# EAGLE board LED_RIng_PCB_v13 (EAGLE 9.7.0)
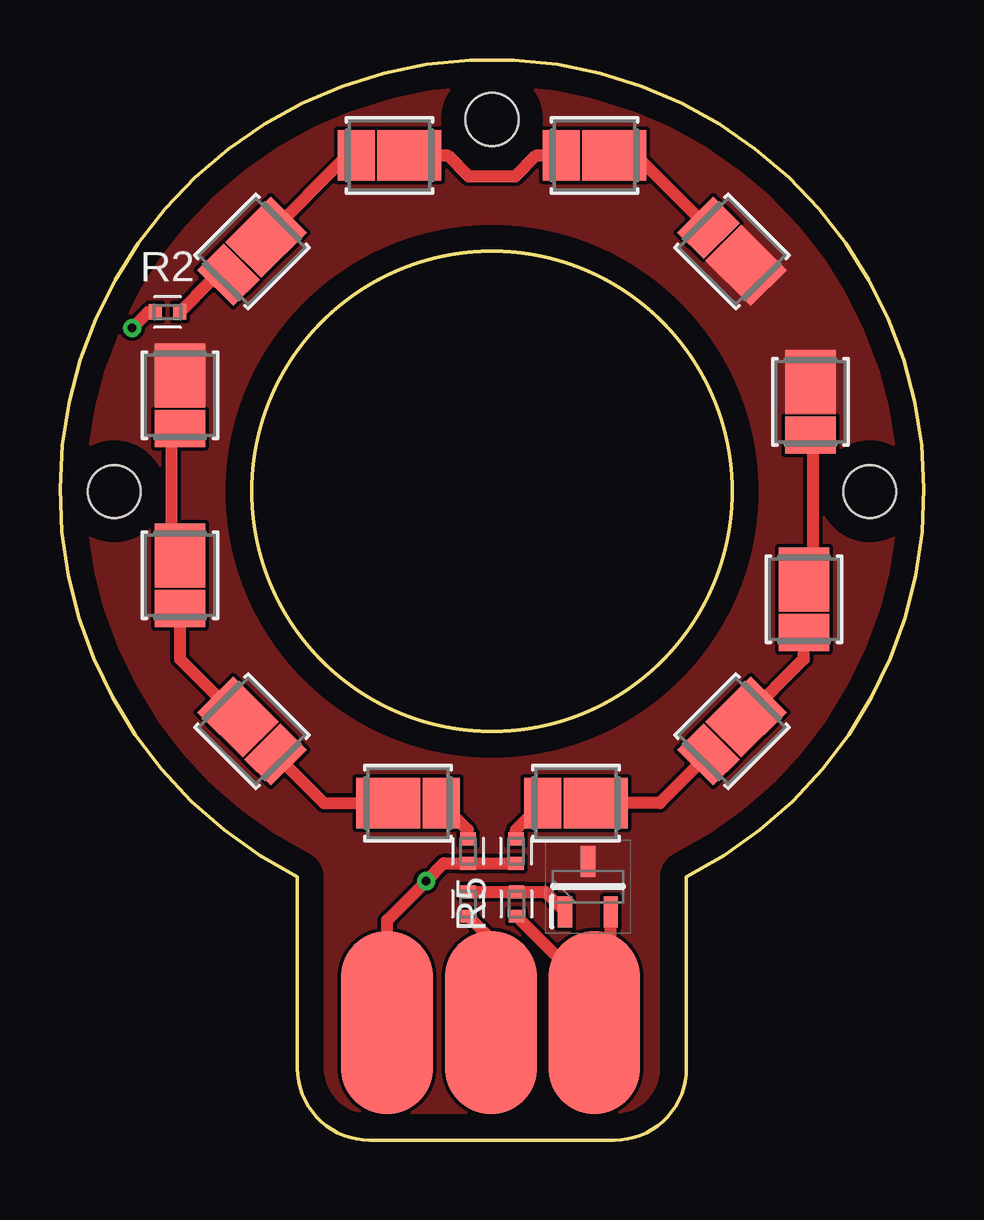
[diagram p0: board, top side]
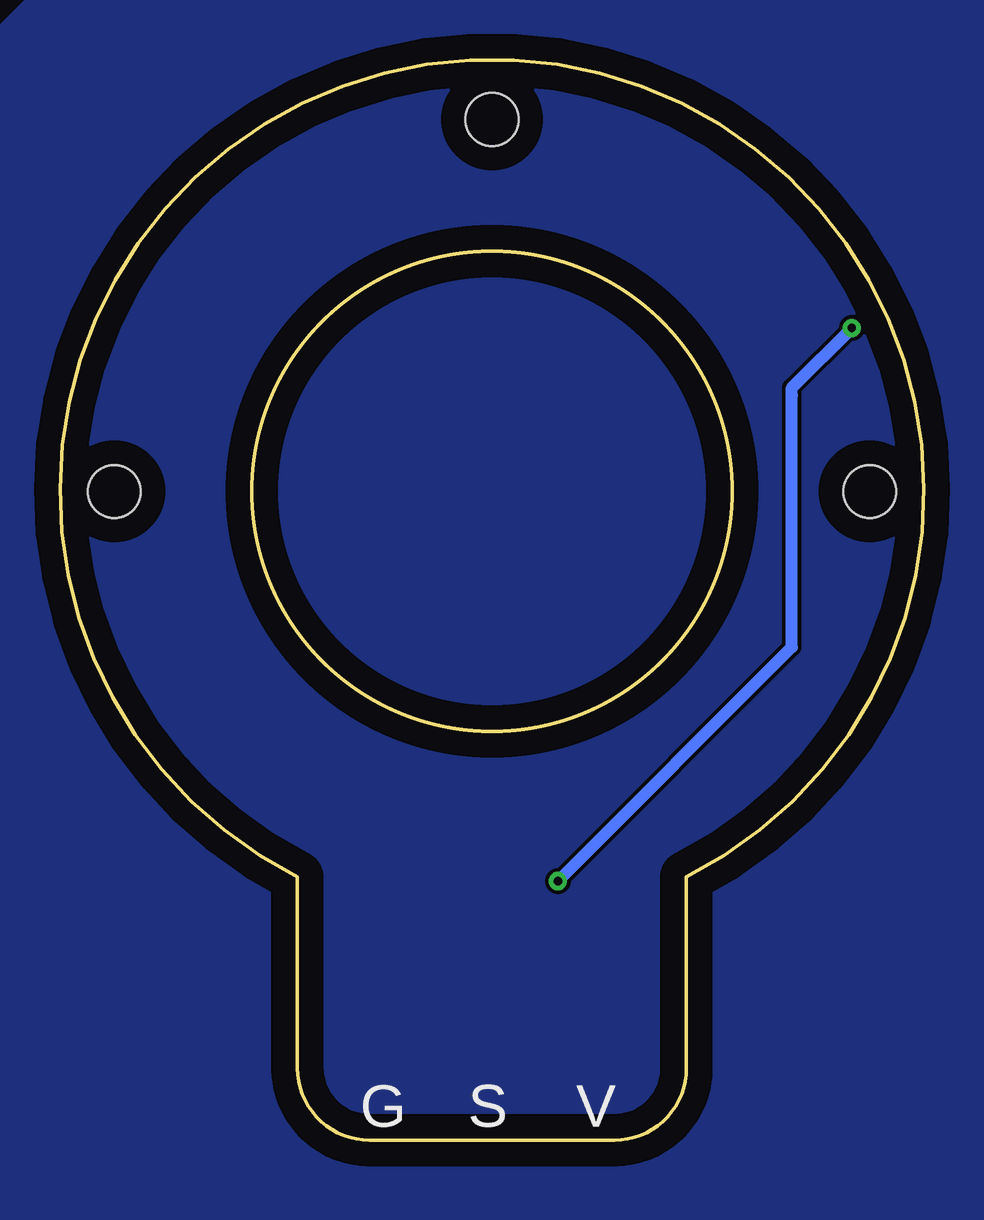
[diagram p1: board, bottom side, seen from below]

Size 36 x 45.02 mm. Coordinates in mm from the lower left corner, seen from the top.
Outline: 23.1,0 arc90 26.1,3 26.1,10.98 arc306 9.9,10.98 9.9,3 arc90 12.9,0 23.1,0
Outline: circle at 18,27.05 radius 10
Copper layers (1*16): Top 0.035mm / dielectric 1.5mm / Bottom 0.035mm
Design rules "Fusion Electronics Design Rules": minimum track width 6mil, minimum drill 0.35mm, track to track 6mil, track to pad 6mil, pad to pad 6mil, via to via 6mil, smd to smd 6mil, copper to edge 40mil, drill to drill 6mil, minimum pad ring 10mil, minimum via ring 8mil, stop-mask expansion 4mil, vias tented up to drill 0mil, thermal gap 10mil
Holes 2.2 mm at 2.26,27.04 33.74,27.04 18,42.55

## Footprints (pad centres in the part's own frame; a part is rotated, then mirrored left to right if it is on the bottom)
LED_SMT-GWJTLMS1.EM_AOS = smd 2.667 x 2.108: 1 -0.826,0 | smd 1.549 x 2.108: 2 1.384,0
SOT95P237X112-3N = smd 1.3 x 0.6: 1 -1.05,0.95; 2 -1.05,-0.95; 3 1.05,0
RESC1005X40 = smd 0.535 x 0.644: 1 -0.507,0; 2 0.507,0
SOLDER_PAD_HOLE = smd 7.62 x 3.81: P$1 0,0

## Placement (x,y rotation side)
LED5  GW_JTLMS1.EM-GWH4-XX53-1-60-R3LED_SMT-GWJTLMS1.EM_AOS  [LED_SMT-GWJTLMS1.EM_AOS]  21.5,14.05 180 top
LED6  GW_JTLMS1.EM-GWH4-XX53-1-60-R3LED_SMT-GWJTLMS1.EM_AOS  [LED_SMT-GWJTLMS1.EM_AOS]  28,17.05 225 top
LED7  GW_JTLMS1.EM-GWH4-XX53-1-60-R3LED_SMT-GWJTLMS1.EM_AOS  [LED_SMT-GWJTLMS1.EM_AOS]  31,22.55 270 top
LED8  GW_JTLMS1.EM-GWH4-XX53-1-60-R3LED_SMT-GWJTLMS1.EM_AOS  [LED_SMT-GWJTLMS1.EM_AOS]  31.27,30.78 270 top
LED9  GW_JTLMS1.EM-GWH4-XX53-1-60-R3LED_SMT-GWJTLMS1.EM_AOS  [LED_SMT-GWJTLMS1.EM_AOS]  8,37.05 225 top
LED10  GW_JTLMS1.EM-GWH4-XX53-1-60-R3LED_SMT-GWJTLMS1.EM_AOS  [LED_SMT-GWJTLMS1.EM_AOS]  13.72,41.05 180 top
LED11  GW_JTLMS1.EM-GWH4-XX53-1-60-R3LED_SMT-GWJTLMS1.EM_AOS  [LED_SMT-GWJTLMS1.EM_AOS]  22.27,41.05 180 top
LED12  GW_JTLMS1.EM-GWH4-XX53-1-60-R3LED_SMT-GWJTLMS1.EM_AOS  [LED_SMT-GWJTLMS1.EM_AOS]  28,37.05 135 top
LED13  GW_JTLMS1.EM-GWH4-XX53-1-60-R3LED_SMT-GWJTLMS1.EM_AOS  [LED_SMT-GWJTLMS1.EM_AOS]  14.5,14.05 0 top
LED14  GW_JTLMS1.EM-GWH4-XX53-1-60-R3LED_SMT-GWJTLMS1.EM_AOS  [LED_SMT-GWJTLMS1.EM_AOS]  8,17.05 315 top
LED15  GW_JTLMS1.EM-GWH4-XX53-1-60-R3LED_SMT-GWJTLMS1.EM_AOS  [LED_SMT-GWJTLMS1.EM_AOS]  5,23.55 270 top
LED16  GW_JTLMS1.EM-GWH4-XX53-1-60-R3LED_SMT-GWJTLMS1.EM_AOS  [LED_SMT-GWJTLMS1.EM_AOS]  5,31.05 270 top
Q1  IRLML6244TRPBF  [SOT95P237X112-3N]  22,10.57 90 top
R1  150  [RESC1005X40]  17,12.05 90 top
R2  [RESC1005X40]  4.48,34.52 0 top
R3  [RESC1005X40]  19,12.05 90 top
R4  330  [RESC1005X40]  17,9.85 90 top
R5  10k  [RESC1005X40]  19.02,9.85 90 top
U$1  SOLDER_PAD_HOLE  [SOLDER_PAD_HOLE]  13.63,4.91 90 top
U$2  SOLDER_PAD_HOLE  [SOLDER_PAD_HOLE]  22.25,4.9 90 top
U$3  SOLDER_PAD_HOLE  [SOLDER_PAD_HOLE]  17.96,4.9 90 top

## Library data of the parts
LED5-LED16 = PNP; COPYRIGHT: Copyright (C) 2025 Ultra Librarian. All rights reserved.; MANUFACTURER_PART_NUMBER: GW JTLMS1.EM-GWH4-XX53-1-60-R33; MFR_NAME: ams OSRAM
Q1 = PNP; DESCRIPTION: INFINEON - IRLML6244TRPBF - MOSFET, N CH, 20V, 6.3A, SOT-23; HEIGHT: 1.12mm; MANUFACTURER_NAME: Infineon; MANUFACTURER_PART_NUMBER: IRLML6244TRPBF; MOUSER_PART_NUMBER: 942-IRLML6244TRPBF; MOUSER_PRICE-STOCK: https://www.mouser.co.uk/ProductDetail/Infineon-Technologies/IRLML6244TRPBF?qs=9%252BKlkBgLFf1HkY%2F2U%252BIhLQ%3D%3D
R1-R5 = Resistor; CATEGORY: Resistors; DESCRIPTION: Chip Resistor 1.05 X 0.54 X 0.40 mm body 0402(1005-METRIC) Package; PACKAGE_SIZE: 0402; PACKAGE_TYPE: SMD
U$1-U$3 = PressHeater

## Nets
12V: R1.1 R2.1 R3.1 U$1.P$1
G: Q1.2 R5.1 U$2.P$1
GND: LED8.1 LED12.1 LED16.1 Q1.3
N$1: Q1.1 R4.2 R5.2
N$2: R4.1 U$3.P$1
N$4: LED5.1 LED6.2
N$5: LED6.1 LED7.2
N$6: LED7.1 LED8.2
N$7: LED9.1 LED10.2
N$8: LED10.1 LED11.2
N$9: LED11.1 LED12.2
N$10: LED13.1 LED14.2
N$11: LED14.1 LED15.2
N$12: LED15.1 LED16.2
N$13: LED13.2 R1.2
N$14: LED9.2 R2.2
N$15: LED5.2 R3.2

## Tracks (layer width: path | path; a pad name or v marks a point on that pad's centre or on a via)
12V  (via drill 0.35)
  Top 0.508: R2.1 3.67,34.52 v3.01,33.85 | 14.04,7.08 14.04,5.32 U$1.P$1 | U$1.P$1 13.63,7.67 | R1.1 17,11.52 | U$1.P$1 13.63,9.17 v15.25,10.79 16,11.54 R1.1 | R1.1 R3.1
  Bottom 0.508: v15.25,10.79 5.5,20.55 5.5,31.05 5.5,31.36 v3.01,33.85
G
  Top 0.508: U$2.P$1 22.45,5.1 | 22.45,5.1 22.95,5.6 Q1.2 | R5.1 22.45,5.91 22.45,5.1
  pour Bottom: 1.53,-9.38 40.97,-9.38 41.42,-8.92 41.42,43.52 31.97,52.97 -1.47,52.97 -8.42,46.02 -8.42,0.58
GND
  pour Top (no thermals): 39.51,-6.88 39.54,-6.89 39.92,-7.27 39.92,43.02 31.97,50.97 2.03,50.97 -6.92,42.02 -6.92,1.58 1.53,-6.88
N$1
  Top 0.508: 21.02,9.55 Q1.1 20.22,10.35 R5.2 R4.2
N$2
  Top 0.508: 18.49,5.44 U$3.P$1 17.96,8.38 R4.1
N$4
  Top 0.508: LED5.1 25,14.05 LED6.2
N$5
  Top 0.508: LED6.1 31,20.05 LED7.2
N$6
  Top 0.508: LED7.1 31.37,23.74 31.37,29.29 LED8.2
N$7
  Top 0.508: LED9.1 12,41.05 LED10.2
N$8
  Top 0.508: LED10.1 16.15,41.05 17.02,40.18 18.98,40.18 19.85,41.05 LED11.2
N$9
  Top 0.508: LED12.2 24,41.05 LED11.1
N$10
  Top 0.508: LED13.1 11,14.05 LED14.2
N$11
  Top 0.508: LED14.1 5,20.05 LED15.2
N$12
  Top 0.508: LED15.1 4.63,24.74 4.63,29.29 LED16.2
N$13
  Top 0.508: R1.2 17,12.93 LED13.2
N$14
  Top 0.508: 7.27,35.82 LED9.2 | 7.27,35.82 7.53,35.56 | R2.2 6.29,35.82 7.27,35.82
N$15
  Top 0.508: R3.2 19,12.93 LED5.2

## Text on the board
bPlace: V | S | G